# Altium PCB display_pcb.PcbDoc
Units mil, origin at the board's own origin, x right, y up, seen from the top; angles counter-clockwise.
Board outline 6000 x 4000 mil, 2 copper layers (Top Layer, Bottom Layer); 12 components, 21 nets, 49 pads, 0 vias.
Unrouted connection lines stored in the file: 21.
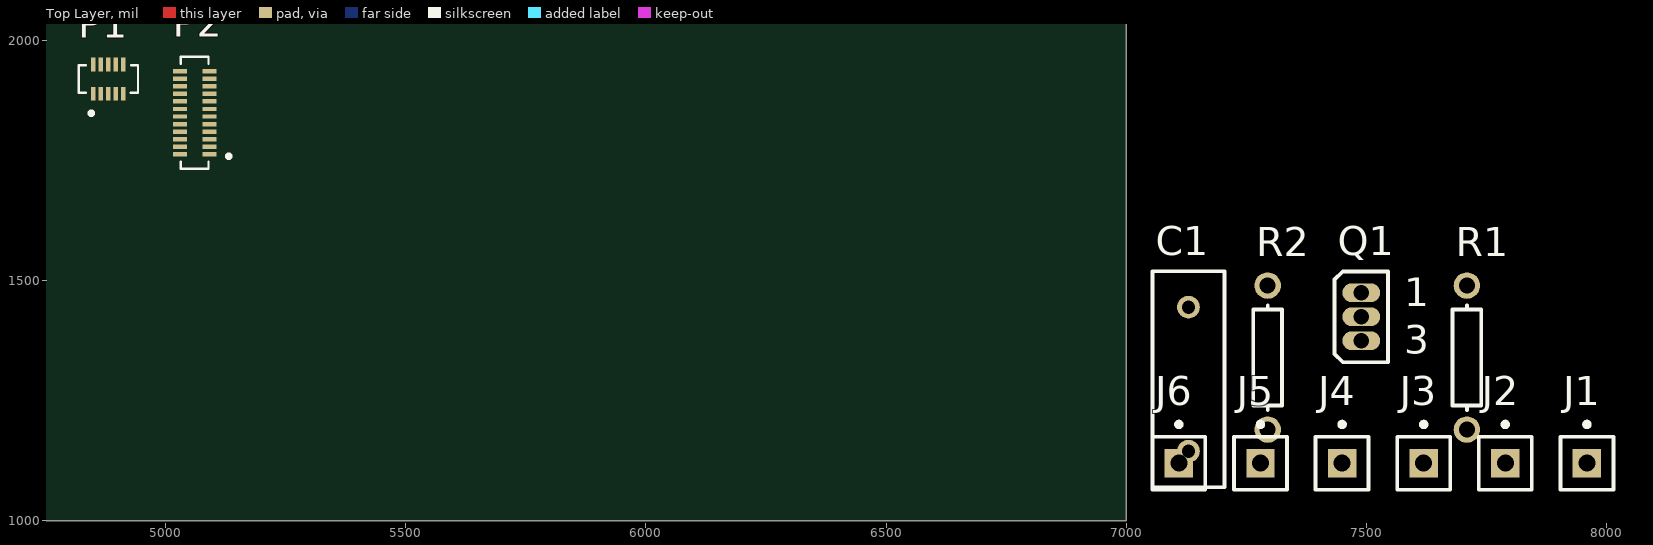
[diagram p0: Top Layer view]
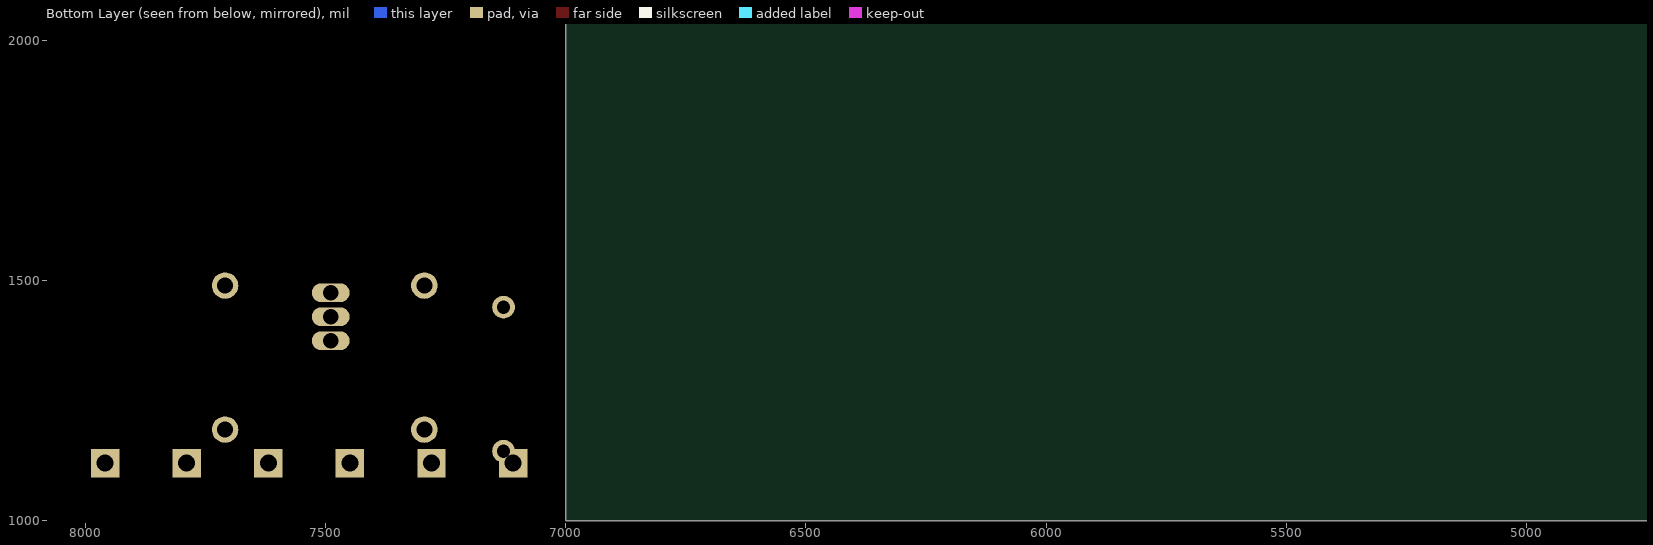
[diagram p1: Bottom Layer view, seen from below]

## Layer stack, top to bottom
Top Solder: solder mask 0.4, Solder Resist, Dk 3.5
Top Layer: signal copper 1.4
Dielectric 1: dielectric 12.6, FR-4, Dk 4.8
Bottom Layer: signal copper 1.4
Bottom Solder: solder mask 0.4, Solder Resist, Dk 3.5

## Board outline
1000,1000 7000,1000 7000,5000 1000,5000

## Design rules (kind name [scope] priority, off if disabled: settings)
Clearance [All] p1: gap=5 ignorepadtopadclearanceinfootprint=FALSE
PolygonConnect [All] p1: connectstyle=Relief reliefconductorwidth=10 reliefentries=4 polygonreliefangle="90 Angle" airgapwidth=10
RoutingVias [All] p1: holewidth=28 width=50 viastyle="Through Hole" minholewidth=28 minwidth=50 maxholewidth=28 maxwidth=50
SolderMaskExpansion [All] p1: expansion=4
Width [All] p1: maxlimit=1000 minlimit=8 preferedwidth=10
30 further rules are at their usual default settings.

## Components (designator, comment, footprint, x,y, rotation, side; value= is the part's Value field where it differs from the comment)
C1 "100nF" RAD-0.3 7130,1295 r90 top value=100pF
J1 "Socket" PIN1 7960,1120 r0 top
J2 "Socket" PIN1 7790,1120 r0 top
J3 "Socket" PIN1 7620,1120 r0 top
J4 "Socket" PIN1 7450,1120 r0 top
J5 "Socket" PIN1 7280,1120 r0 top
J6 "Socket" PIN1 7110,1120 r0 top
P1 "Touch" HRS_DF37C-10DP-0.4V(51) 4880,1920 r0 top
P2 "Header 12X2" HRS_DF37C-24DP-0.4V(51) 5060,1850 r90 top
Q1 "MOSFET-N" E3 7490,1425 r0 top
R1 "1k" AXIAL-0.3 7710,1340 r90 top value=1K
R2 "10k" AXIAL-0.3 7295,1340 r90 top value=1K

## Footprints (in the part's own frame and the unit in brackets; to place one, negate y for a bottom-side part, rotate by r counter-clockwise, add the part's x,y. Pads: shape width x height; smd on the part's side, far side on the other; paste and mask are expansions set on the pad)
AXIAL-0.3 [mm] "Axial Device, Thru-Hole; 2 Leads; 0.3 in Pin Spacing"
  round 1.4 hole 0.85: 1(-3.81,0) 2(3.81,0)
  silkscreen extent -2.77,-0.76 2.77,0.76
E3 [mm] "TO, Flat Index; 3 In-Line, Axial Leads; Body Dia. 4.6mm; Lead Dia. 0.5 mm (max)"
  oval 2x1 hole 0.8: 1(0,1.27) 2(0,0) 3(0,-1.27)
  silkscreen extent -1.41,-2.41 1.41,2.41
HRS_DF37C-10DP-0.4V(51) [mm]
  rect 0.23x0.73 smd: 1(-0.8,-0.775) 2(-0.8,0.775) 3(-0.4,-0.775) 4(-0.4,0.775) 5(0,-0.775) 6(0,0.775) 7(0.4,-0.775) 8(0.4,0.775) 9(0.8,-0.775) 10(0.8,0.775)
  silkscreen extent -1.57,-1.9 1.57,0.73
HRS_DF37C-24DP-0.4V(51) [mm]
  rect 0.23x0.73 smd: 1(-2.2,-0.775) 2(-2.2,0.775) 3(-1.8,-0.775) 4(-1.8,0.775) 5(-1.4,-0.775) 6(-1.4,0.775) 7(-1,-0.775) 8(-1,0.775) 9(-0.6,-0.775) 10(-0.6,0.775) 11(-0.2,-0.775) 12(-0.2,0.775) 13(0.2,-0.775) 14(0.2,0.775) 15(0.6,-0.775) 16(0.6,0.775) 17(1,-0.775) 18(1,0.775) 19(1.4,-0.775) 20(1.4,0.775) 21(1.8,-0.775) 22(1.8,0.775) 23(2.2,-0.775) 24(2.2,0.775)
  silkscreen extent -2.97,-1.9 2.97,0.73
PIN1 [mm] "Connector; Plug"
  rect 1.5x1.5 hole 0.9: 1(0,0)
  silkscreen extent -1.4,-1.4 1.4,2.17
RAD-0.3 [mm] "Radial Cap, Thru-Hole; 2 Leads; 0.3 in Pin Spacing"
  round 1.2 hole 0.7: 1(-3.81,0) 2(3.81,0)
  silkscreen extent -5.71,-1.91 5.71,1.91

## Part data
C1: library part Cap, "Capacitor", LatestRevisionDate=17-Jul-2002, LatestRevisionNote="Re-released for DXP Platform.", PackageDescription="Radial Cap, Thru-Hole; 2 Leads; 0.3 in Pin Spacing", PackageReference=RAD-0.3, Published=8-Jun-2000, Publisher="Altium Limited"
P1: library part "Header 5X2", "Header, 5-Pin, Dual row", LatestRevisionDate=17-Jul-2002, LatestRevisionNote="Re-released for DXP Platform.", Publisher="Altium Limited"
P2: "Header, 12-Pin, Dual row", LatestRevisionDate=17-Jul-2002, LatestRevisionNote="Re-released for DXP Platform.", Publisher="Altium Limited"
Q1: "N-Channel MOSFET", LatestRevisionDate=17-Jul-2002, LatestRevisionNote="Re-released for DXP Platform.", PackageDescription="TO, Flat Index; 3 In-Line, Axial Leads; Body Dia. 4.6mm; Lead Dia. 0.5 mm (max)", PackageReference=E3, PackageVersion=1995/1996, Published=8-Jun-2000, Publisher="Altium Limited"
R1 R2: library part Res1, "Resistor", LatestRevisionDate=17-Jul-2002, LatestRevisionNote="Re-released for DXP Platform.", PackageDescription="Axial Device, Thru-Hole; 2 Leads; 0.3 in Pin Spacing", PackageReference=AXIAL-0.3, Published=8-Jun-2000, Publisher="Altium Limited"
J1 J2 J3 J4 J5 J6: LatestRevisionDate=17-Jul-2002, LatestRevisionNote="Re-released for DXP Platform.", Publisher="Altium Limited"

## Nets (pads, with @x,y where several pads share a name; then routed paths per layer and width w, separated by ;. In a path a pad name is that pad's centre, name@x,y a point inside that pad or via, vN(x,y) a via of type N, cw(c..) or ccw(c..) an arc to the next point about the centre after c; other vN are vias at no path point)
BASE_C\S\: J5.1
BASE_MISO: J2.1
BASE_MOSI: J3.1
BASE_SCL: J4.1
BL_PWM: R1.1
D_CS: P2.9
D_FMARK: P2.5
D_LED_A: P2.23 P2.24
D_LED_K: P2.1 P2.2 Q1.1
D_RST: P2.10
D_SCL: P1.5 P2.8
D_SDA: P1.4 P2.6
D_WR: P2.7
GND: C1.1 J6.1 P1.1 P1.3 P1.6 P1.8 P1.10 P2.3 P2.4 P2.15 P2.16 Q1.3 R2.1
NetC1_2: C1.2
NetQ1_2: Q1.2 R1.2 R2.2
T_INT: P1.2
T_RST: P1.7
V18: P2.11 P2.12
V28: P1.9 P2.13 P2.14
VDD33: J1.1
pads on no net: P2.17 P2.18 P2.19 P2.20 P2.21 P2.22

## Text inside footprints (layer, text, board x,y; h text height)
Q1: Top Overlay "1" at 7579.57,1446.85 h59.05; Top Overlay "3" at 7579.57,1347.72 h59.05